# Altium PCB oled_control.PcbDoc
Units mm, origin at the board's own origin, x right, y up, seen from the top; angles counter-clockwise.
Board outline 80.24 x 28.14 mm, 2 copper layers (Top Layer, Bottom Layer); 56 components, 41 nets, 225 pads, 54 vias.
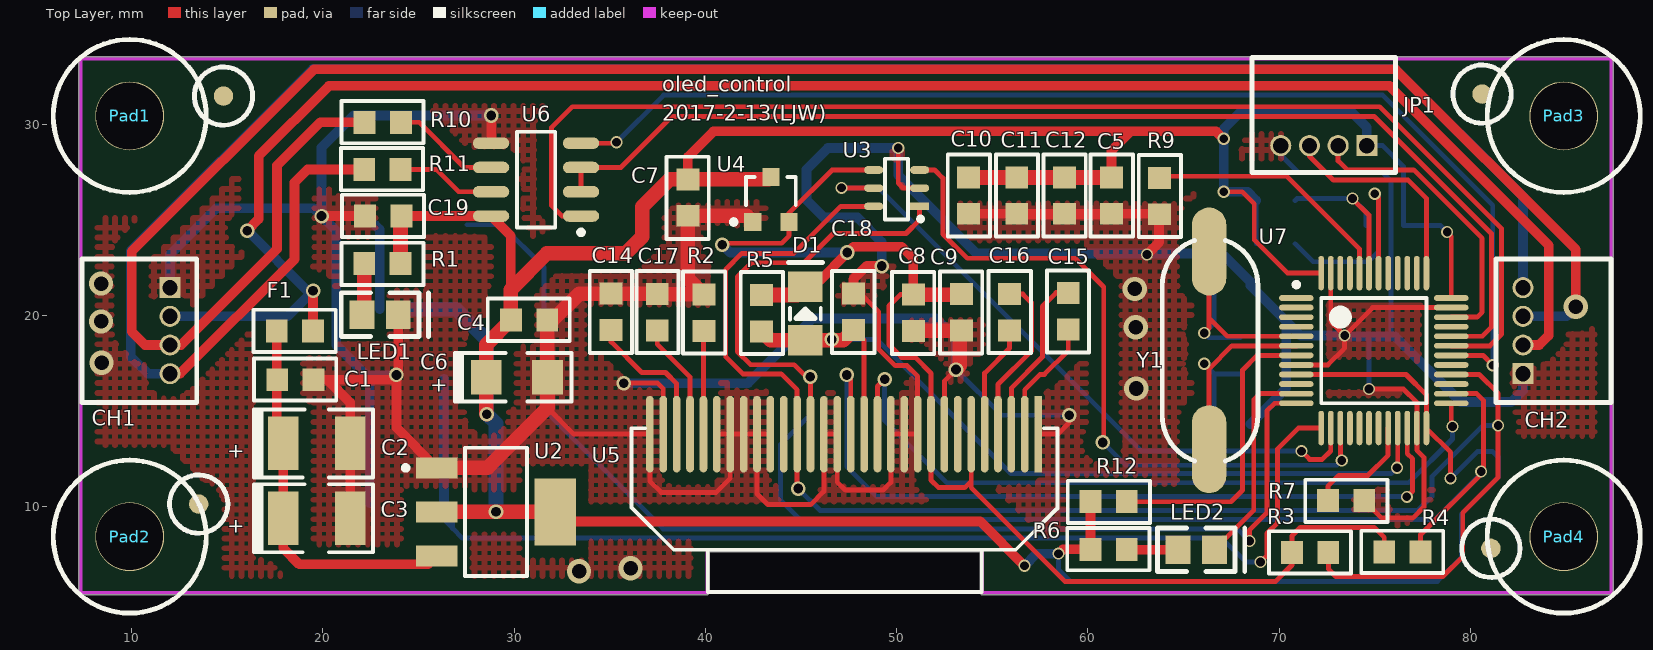
[diagram p0: Top Layer view]
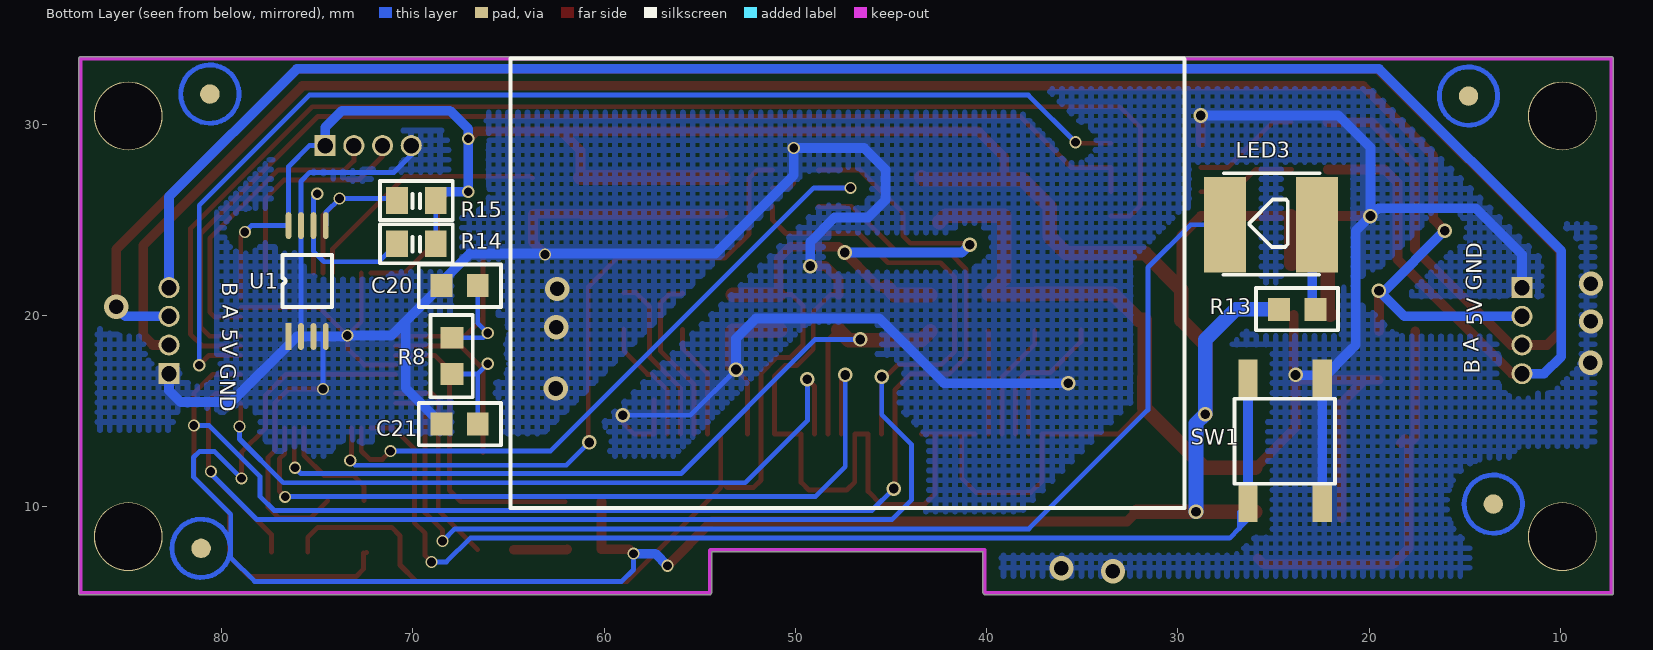
[diagram p1: Bottom Layer view, seen from below]

## Layer stack, top to bottom
Top Solder: solder mask 0.0102, Solder Resist, Dk 3.5
Top Layer: signal copper 0.0356
Dielectric 1: dielectric 0.32, FR-4, Dk 4.8
Bottom Layer: signal copper 0.0356
Bottom Solder: solder mask 0.0102, Solder Resist, Dk 3.5

## Board outline
7.341,5.386 40.056,5.386 ccw(c40.056,5.486) 40.127,5.415 40.178,5.466 ccw(c40.107,5.537) 40.207,5.537 40.207,7.647 54.383,7.647 54.383,5.512 ccw(c54.483,5.512) 54.412,5.441 54.437,5.415 ccw(c54.508,5.486) 54.508,5.386 87.376,5.386 ccw(c87.376,5.486) 87.476,5.486 87.476,33.426 ccw(c87.376,33.426) 87.376,33.527 7.341,33.527 ccw(c7.341,33.426) 7.24,33.426 7.24,5.486 ccw(c7.341,5.486)

## Design rules (kind name [scope] priority, off if disabled: settings)
Clearance Clearance_1 [InPolygon] p1: gap=0.635
Clearance [All] p2: gap=0.178
ComponentClearance [All] p1: gap=0 collisioncheckmode=3 verticalgap=0 showdistances=FALSE
PolygonConnect [All] p1: connectstyle=Direct reliefconductorwidth=0.254 reliefentries=4 polygonreliefangle="90 Angle" airgapwidth=0.254
RoutingVias [All] p1: holewidth=0.711 width=1.27 viastyle="Through Hole" minholewidth=0.711 minwidth=1.27 maxholewidth=0.711 maxwidth=1.27
SolderMaskExpansion [All] p1: expansion=0.102
Width [All] p1: maxlimit=2.54 minlimit=0.254 preferedwidth=2.54
28 further rules are at their usual default settings.

## Components (designator, comment, footprint, x,y, rotation, side; value= is the part's Value field where it differs from the comment)
C1 "Cap" 0805 18.567,16.637 r180 top
C2 "C_2200uF" "B: 3528" 19.685,13.31 r0 top
C3 "C_2200uF" "B: 3528" 19.685,9.398 r0 top
C4 "Cap" 0805 30.785,19.761 r180 top
C5 "Cap" 0805 61.239,26.264 r90 top
C6 "Cap Pol3" "CAP A-3216" 30.15,16.764 r0 top
C7 "Cap" 0805 39.091,26.162 r270 top
C8 "Cap" 0805 50.876,20.142 r270 top
C9 "Cap" 0805 53.391,20.168 r270 top
C10 "Cap" 0805 53.772,26.264 r90 top
C11 "Cap" 0805 56.286,26.264 r90 top
C12 "Cap" 0805 58.776,26.264 r90 top
C14 "Cap" 0805 35.077,20.193 r270 top
C15 "Cap" 0805 58.979,20.218 r270 top
C16 "Cap" 0805 55.905,20.168 r90 top
C17 "Cap" 0805 37.49,20.168 r90 top
C18 "Cap" 0805 47.752,20.193 r270 top
C19 "Cap" 0805 23.165,25.197 r180 top
C20 "Cap" 0805 67.564,21.565 r180 bottom
C21 "Cap" 0805 67.564,14.326 r180 bottom
CH1 "HEADER1X4" CON4_1.5 12.014,19.202 r270 top
CH2 "HEADER1X4" CON4_1.5 82.753,19.202 r90 top
D1 "Diode 1N4148" LL34 45.237,18.694 r90 top
F1 "FUSE" 0805 18.542,19.177 r180 top
JP1 "4 HEADER" CON4_1.5 72.339,28.88 r180 top
LED1 "" LED-0805 22.047,20.041 r0 top
LED2 "" LED-0805 64.719,7.747 r0 top
LED3 "" LED_5X5 22.733,24.74 r0 bottom
Pad1 "Pad" pad35 9.881,30.429 r0 top
Pad2 "Pad" pad35 9.881,8.433 r0 top
Pad3 "Pad" pad35 84.861,30.429 r0 top
Pad4 "Pad" pad35 84.861,8.433 r0 top
R1 "Res2" 0805 23.114,22.708 r0 top
R2 "Res2" 0805 39.929,20.142 r90 top
R3 "Res2" 0805 71.628,7.595 r180 top
R4 "Res2" 0805 76.454,7.62 r180 top
R5 "Res2" 0805 42.951,20.117 r90 top
R6 "Res2" 0805 61.087,7.772 r180 top
R7 "Res2" 0805 73.508,10.312 r0 top
R8 "Res2" 0805 67.97,17.882 r270 bottom
R9 "Res2" 0805 63.754,26.238 r90 top
R10 "Res2" 0805 23.139,30.099 r180 top
R11 "Res2" 0805 23.114,27.635 r180 top
R12 "Res2" 0805 61.087,10.262 r0 top
R13 "Res2" 0805 23.765,20.32 r0 bottom
R14 "Res2" C0805tan 69.825,23.749 r180 bottom
R15 "Res2" C0805tan 69.825,26.01 r180 bottom
SW1 "SW-KEY-2" KEY_SOP4X4 23.673,12.598 r270 bottom
U1 "AT24c02" TSSOP8 76.505,18.898 r90 bottom
U2 "AMS1117-3.3" SOT223 29.058,9.728 r270 top
U3 "GT20L16S1Y" SOT23-6 51.206,25.705 r180 top
U4 "662K" SOT-23 43.434,26.06 r0 top
U5 "OLED_0.96_12864" OLED_1.30_12864 57.404,13.792 r180 top
U6 "MAX3485CSA" NS08-L 33.503,25.197 r180 top
U7 "STM32F103C8T6" LQFP48 74.955,18.161 r0 top
Y1 "8MHz" XTAL_US1 66.396,20.599 r270 top

## Footprints (in the part's own frame and the unit in brackets; to place one, negate y for a bottom-side part, rotate by r counter-clockwise, add the part's x,y. Pads: shape width x height; smd on the part's side, far side on the other; paste and mask are expansions set on the pad)
0805 [mm] "1.14mm,1.2mm,3.05mm"
  rect 1.14x1.2 smd: 1(-0.95,0) 2(0.95,0)
  silkscreen extent -2.13,-1.12 2.16,1.09
"B: 3528" [mm] "钽电容B型"
  rect 1.6x2.8 smd: 1(-1.75,0) 2(1.75,0)
  silkscreen extent -3.27,-1.78 2.95,1.78
C0805tan [mil]
  rect 45x55 smd: 1(-40,0) 2(40,0)
  silkscreen extent -75,-40 75,40
"CAP A-3216" [mm]
  rect 1.6x1.8 smd: 1(-1.6,0) 2(1.6,0)
  silkscreen extent -3.25,-1.27 2.85,1.27
CON4_1.5 [mm]
  rect 1.1x1.1 hole 0.8: 1(-2.25,0)
  round 1.1 hole 0.8: 2(-0.75,0) 3(0.75,0) 4(2.25,0)
  silkscreen extent -3.75,-4.6 3.75,1.4
KEY_SOP4X4 [mm]
  rect 2x1 smd: 1(-4.089,1.219) 1(2.412,1.219) 2(-4.089,-2.671) 2(2.412,-2.671)
  silkscreen extent -3.05,-3.38 1.4,1.88
LED-0805 [mm]
  rect 1.3x1.5 smd: 1(0,0) 2(1.9,0)
  silkscreen extent -1.08,-1.14 3.49,1.14
LED_5X5 [mm]
  rect 2.2x5 smd: 1(0,0) 2(4.801,0)
  silkscreen extent -0.13,-2.69 4.9,2.62
LL34 [mm]
  rect 1.6x1.8 smd: 1(0,0) 2(2.8,0)
  silkscreen extent 1.1,-0.89 4.07,0.89
LQFP48 [mm]
  oval 1.8x0.3 smd: 1(-4.05,2.75) 2(-4.05,2.25) 3(-4.05,1.75) 4(-4.05,1.25) 5(-4.05,0.75) 6(-4.05,0.25) 7(-4.05,-0.25) 8(-4.05,-0.75) 9(-4.05,-1.25) 10(-4.05,-1.75) 11(-4.05,-2.25) 12(-4.05,-2.75) 25(4.05,-2.75) 26(4.05,-2.25) 27(4.05,-1.75) 28(4.05,-1.25) 29(4.05,-0.75) 30(4.05,-0.25) 31(4.05,0.25) 32(4.05,0.75) 33(4.05,1.25) 34(4.05,1.75) 35(4.05,2.25) 36(4.05,2.75)
  oval 0.3x1.8 smd: 13(-2.75,-4.05) 14(-2.25,-4.05) 15(-1.75,-4.05) 16(-1.25,-4.05) 17(-0.75,-4.05) 18(-0.25,-4.05) 19(0.25,-4.05) 20(0.75,-4.05) 21(1.25,-4.05) 22(1.75,-4.05) 23(2.25,-4.05) 24(2.75,-4.05) 37(2.75,4.05) 38(2.25,4.05) 39(1.75,4.05) 40(1.25,4.05) 41(0.75,4.05) 42(0.25,4.05) 43(-0.25,4.05) 44(-0.75,4.05) 45(-1.25,4.05) 46(-1.75,4.05) 47(-2.25,4.05) 48(-2.75,4.05)
  silkscreen extent -4.17,-2.75 2.75,3.57, body extent -3.5,-3.5 3.5,3.5, height 1.6
NS08-L [mm] "SOIC, 8-Leads, Body 4.9x3.9mm, Pitch 1.27mm, IPC High Density"
  oval 1.9x0.6 smd: 1(0,0) 2(0,-1.27) 3(0,-2.54) 4(0,-3.81) 5(4.7,-3.81) 6(4.7,-2.54) 7(4.7,-1.27) 8(4.7,0)
  silkscreen extent -0.13,-4.41 3.35,0.97, body extent 0.4,-4.36 4.3,0.55, height 1.75
OLED_1.30_12864 [mm]
  rect 0.4x4 smd: 1(0,0)
  oval 0.4x4 smd: 2(0.7,0) 3(1.4,0) 4(2.1,0) 5(2.8,0) 6(3.5,0) 7(4.2,0) 8(4.9,0) 9(5.6,0) 10(6.3,0) 11(7,0) 12(7.7,0) 13(8.4,0) 14(9.1,0) 15(9.8,0) 16(10.5,0) 17(11.2,0) 18(11.9,0) 19(12.6,0) 20(13.3,0) 21(14,0) 22(14.7,0) 23(15.4,0) 24(16.1,0) 25(16.8,0) 26(17.5,0) 27(18.2,0) 28(18.9,0) 29(19.6,0) 30(20.3,0)
  silkscreen extent -1.02,-0.3 21.26,8.26
pad35 [mm]
  round 3.6 hole 3.5: 1(0.025,0)
  silkscreen extent -3.97,-4 4.03,4
SOT23-6 [mm]
  rect 1x0.4 smd: 1(0,0)
  oval 1x0.4 smd: 2(0,-0.95) 3(0,-1.9) 4(2.4,-1.9) 5(2.4,-0.95) 6(2.4,0)
  silkscreen extent -0.15,-2.49 1.8,0.76
SOT223 [mm] "SOT-223/SC-73; 4 Leads; Body 6.7 x 7.3 mm, inc. leads (LxW max)"
  rect 1.1x2.15 smd: 1(-2.3,-3.1) 2(0,-3.1) 3(2.3,-3.1)
  rect 3.5x2.15 smd: 4(0,3.1)
  silkscreen extent -3.35,-4.85 3.35,1.63
SOT-23 [mm]
  rect 0.9x0.95 smd: 1(-0.95,-1.175) 2(0.95,-1.175) 3(0,1.175)
  silkscreen extent -2.07,-1.3 1.3,1.18
TSSOP8 [mm]
  rect 1.4x0.3 smd: 1(0,0)
  oval 1.4x0.3 smd: 2(0,-0.65) 3(0,-1.3) 4(0,-1.95) 5(5.8,-1.95) 6(5.8,-1.3) 7(5.8,-0.65) 8(5.8,0)
  silkscreen extent 1.53,-2.28 4.27,0.33
XTAL_US1 [mm]
  oval 4.6x1.8 smd: 1(-2.743,-0.051) 2(7.595,-0.051)
  silkscreen extent -3.33,-2.5 8.21,2.5

## Part data
C1 C4 C5 C7 C8 C9 C10 C11 C12 C14 C15 C16 C17 C18 C19 C20 C21: "Capacitor"
C6: "Polarized Capacitor (Surface Mount)"
D1: "High Conductance Fast Diode"
JP1: "4 Pin Header"
LED1 LED2 LED3: library part LED2, "Typical RED, GREEN, YELLOW, AMBER GaAs LED"
R1 R2 R3 R4 R5 R6 R7 R8 R9 R10 R11 R12 R13 R14 R15: "Resistor"
U1: library part TI24c02
U2: library part AMS1117-5
U6: library part MAX485CSA
Y1: library part XTAL, "Crystal Oscillator"

## Free pads (board coordinates)
  round 1.016 smd: 0(13.513,10.135) 0(14.808,31.471) 0(80.62,31.572) 0(81.077,7.823)
  round 1.016 smd far side: 0(13.513,10.135) 0(14.808,31.471) 0(80.62,31.572) 0(81.077,7.823)
  round 3.048 on Top Solder: 1(13.513,10.135) 1(14.808,31.471) 1(80.62,31.572) 1(81.077,7.823)
  round 3.048 on Bottom Solder: 1(13.513,10.135) 1(14.808,31.471) 1(80.62,31.572) 1(81.077,7.823)

## Via types
v1: diameter 0.635, hole 0.457, Top Layer to Bottom Layer, 26 vias
v2: diameter 0.762, hole 0.508, Top Layer to Bottom Layer, 19 vias
v3: diameter 1.27, hole 0.762, Top Layer to Bottom Layer, 9 vias

## Nets (pads, with @x,y where several pads share a name; then routed paths per layer and width w, separated by ;. In a path a pad name is that pad's centre, name@x,y a point inside that pad or via, vN(x,y) a via of type N, cw(c..) or ccw(c..) an arc to the next point about the centre after c; other vN are vias at no path point)
485_A: CH1.3 CH2.3 R10.2 | length 113.4
  Top Layer w0.508: R10.2 19.863,30.099 17.602,27.838 17.602,23.47 12.585,18.452 CH1.3 10.707,18.452 10.008,19.152 10.008,23.343 19.533,32.868 76.098,32.868 85.522,23.444 v3(85.522,20.447)
  Bottom Layer w0.508: CH2.3 85.027,19.952 v3(85.522,20.447)
485_B: CH1.4 CH2.4 R11.2 | length 109.1
  Top Layer w0.508: CH1.4 12.533,16.952 18.517,22.936 18.517,26.949 19.202,27.635 R11.2
  Bottom Layer w0.508: CH1.4 10.861,16.952 9.957,17.856 9.957,23.368 19.483,32.895 76.071,32.895 82.753,26.213 CH2.4
+3.3V: C4.2 C5.2 C6.1 C7.1 C10.2 C11.2 C12.2 C19.1 JP1.1 R1.2 R6.2 R12.1 R13.2 R14.2 R15.2 U1.8 U2.2 U2.4 U4.3 U6.8 U7.9 U7.24 U7.36 U7.48 | length 217.4
  Top Layer w0.254: v1(67.107,26.467) 68.072,26.467 68.707,25.832 68.707,23.952 70.448,22.211 U7.48 ; U7.9 76.637,16.911 77.705,15.843 U7.24 78.969,12.848 v1(78.969,11.481) ; v1@78.715,24.435 v1(78.791,24.359) 79.005,24.144 U7.36
  Top Layer w0.508: C19.1 U6.8 29.835,24.165 29.835,21.351 ; U2.4 32.666,9.22 54.381,9.22 v1(56.693,6.909) ; C7.1 39.091,28.296 40.424,29.629 62.243,29.629 ; v1(58.471,7.544) 58.699,7.772 R6.2 R12.1 ; C5.2 61.239,28.626 62.243,29.629 ; v1(67.107,29.235) 66.713,29.629 62.243,29.629
  Top Layer w0.762: R1.2 24.064,25.146 C19.1 ; U2.2 v2(29.058,9.728) U2.4 ; v2(28.575,14.834) 28.55,14.859 C6.1 28.55,18.476 C4.2 29.835,21.351 31.725,23.241 35.839,23.241 36.703,24.105 36.703,25.679 38.136,27.112 C7.1 43.311,27.112 U4.3 ; C10.2 C11.2 C12.2 C5.2
  Bottom Layer w0.254: v1(58.471,7.544) 58.471,6.706 59.08,6.096 78.283,6.096 79.527,7.341 79.527,9.601 81.483,11.557 81.483,12.573 81.178,12.878 80.366,12.878 v1(78.969,11.481) ; R14.2 R15.2 ; JP1.1 75.413,28.88 76.505,27.788 U1.8 78.452,24.698 v1(78.791,24.359) ; 82.601,7.823 ccw(c81.077,7.823) 82.601,7.823
  Bottom Layer w0.508: v1(56.693,6.909) 57.328,7.544 v1(58.471,7.544) ; R15.2 68.351,26.467 v1(67.107,26.467) v1(67.107,29.235) 67.107,29.743 68.072,30.709 73.711,30.709 74.589,29.83 JP1.1
  Bottom Layer w0.762: R13.2 26.975,20.32 28.575,18.72 v2(28.575,14.834) 29.058,14.351 v2(29.058,9.728)
+5V_IN: CH1.2 CH2.2 F1.1 | length 97.8
  Top Layer w0.508: v2(16.053,24.435) 16.65,25.032 16.65,28.334 20.32,32.004 75.771,32.004 84.099,23.676 84.099,18.948 83.603,18.452 CH2.2 ; F1.1 v2(19.492,21.285) 19.492,21.346 v2@19.507,21.361
  Bottom Layer w0.508: CH1.2 18.159,19.952 v2(19.492,21.285) 19.202,21.285 v2(16.053,24.435)
CLK: R4.1 U3.1 U5.18 U7.26 | length 79.2
  Top Layer w0.254: v2@45.39,16.688 44.653,17.424 42.367,17.424 41.681,18.11 41.681,22.022 42.418,22.758 45.161,22.758 46.685,24.282 50.495,24.282 51.206,24.994 U3.1 ; v2(45.491,16.789) 45.504,16.777 U5.18 ; R4.1 77.404,8.545 80.696,11.836 80.696,15.545 80.33,15.911 U7.26
  Bottom Layer w0.254: v2(45.491,16.789) 45.491,14.808 43.942,13.259 43.942,10.338 44.958,9.322 78.156,9.322 80.594,11.76 80.696,11.76 80.62,11.836 v1(80.569,11.836)
CS1: U5.13 U7.25 | length 39.1
  Top Layer w0.254: U5.13 49.004,16.289 v2(49.378,16.662) ; U7.25 79.005,14.263 v1(79.07,14.199)
  Bottom Layer w0.254: v2(49.378,16.662) 49.378,14.503 52.629,11.252 76.784,11.252 79.07,13.538 v1(79.07,14.199)
CS2: U3.3 U7.15 | length 36.8
  Top Layer w0.254: U3.3 51.999,27.605 52.426,27.178 52.426,24.257 53.696,22.987 59.334,22.987 60.833,21.488 60.833,13.411 v2(60.782,13.36) ; U7.15 73.205,12.494 v1(73.279,12.421)
  Bottom Layer w0.254: v2(60.782,13.36) 61.976,12.167 73.025,12.167 v1(73.279,12.421)
D/C: U5.15 U7.22 | length 42.7
  Top Layer w0.254: v2(47.396,16.891) 47.523,16.891 47.604,16.81 U5.15 ; U7.22 76.705,12.779 76.987,12.497 76.987,10.82 v1(76.683,10.516) 76.683,10.363 76.708,10.338 v1@76.784,10.414
  Bottom Layer w0.254: v2(47.396,16.891) 47.396,12.09 48.946,10.541 76.86,10.541 76.683,10.363 v1(76.683,10.516)
FSO: U3.5 U7.14 | length 34.5
  Top Layer w0.254: v1(47.117,26.67) 47.132,26.655 U3.5 ; v1(71.171,12.903) 71.603,12.471 72.263,12.471 72.705,12.914 U7.14
  Bottom Layer w0.254: v1(47.117,26.67) 49.047,26.67 62.814,12.903 v1(71.171,12.903)
GND: C1.1 C2.2 C3.2 C4.1 C5.1 C6.2 C7.2 C8.2 C9.2 C10.1 C11.1 C12.1 C14.1 C17.2 C18.1 C19.2 C20.1 C21.1 CH1.1 CH2.1 JP1.4 LED1.2 R2.2 R7.2 R9.1 SW1.1 U1.1 U1.2 U1.3 U1.4 U1.7 U2.1 U3.2 U4.1 U5.1 U5.8 U5.10 U5.11 U5.12 U5.16 U5.17 U5.21 U5.22 U5.23 U5.24 U5.25 U5.29 U5.30 U6.5 U7.8 U7.23 U7.35 U7.47 | length 314.7
  Top Layer w0.254: 31.75,15.164 33.121,13.792 U5.30 37.104,11.334 37.694,10.744 40.564,10.744 41.304,11.484 U5.24 ; v2(35.738,16.459) 37.516,16.459 37.804,16.171 U5.29 ; U5.25 U5.24 ; U5.21 U5.22 ; C18.1@47.752,21.092 48.174,21.092 49.073,20.193 49.073,18.237 49.936,17.374 50.546,17.374 51.104,16.816 U5.10 U5.11 U5.12 49.704,11.274 49.301,10.871 47.32,10.871 46.904,11.287 U5.16 U5.17 46.204,10.796 45.517,10.109 43.282,10.109 42.704,10.687 U5.22 ; v1(50.089,28.753) 50.089,26.924 50.358,26.655 U3.2 ; U5.8 52.504,16.563 v2(53.111,17.17) ; U5.1@57.404,15.57 U5.1 58.42,13.792 59.03,14.402 v2(59.03,14.783) ; U7.8 72.554,17.411 73.431,18.288 v1(73.431,18.948) ; U7.47 72.705,19.674 v1(73.431,18.948) ; R7.2 75.347,9.423 77.013,9.423 77.572,9.982 77.572,12.585 77.205,12.951 U7.23 77.205,15.454 76.505,16.154 v1(74.701,16.154) ; U7.35 74.894,20.411 v1(73.431,18.948) ; U5.24 U5.23 U5.22
  Top Layer w0.508: C1.1 20.244,16.637 ; v2(19.939,25.197) C19.2 ; C3.2 C2.2 21.435,15.446 20.244,16.637 ; LED1.2 23.947,16.988 v2(23.851,16.891) ; U2.1 23.851,14.135 v2(23.851,16.891) ; U6.5 v2(28.804,30.455) v2(28.804,30.455) ; C18.1@47.752,21.092 C18.1 47.752,21.895 48.438,22.581 v2(49.225,22.581) ; C10.1 C11.1 C12.1 C5.1 63.729,25.314 63.729,23.825 v1(63.094,23.19) ; C11.1@56.159,25.263 C5.1@61.163,25.263 ; 20.244,16.637 23.597,16.637 v2(23.851,16.891)
  Top Layer w0.762: U2.1 28.614,12.028 31.75,15.164 C6.2 31.735,16.779 C4.1 32.029,19.761 33.411,21.143 C14.1 37.465,21.143 C17.2 39.903,21.118 39.091,21.93 C7.2 42.157,25.212 U4.1 ; C8.2@50.8,19.218 C8.2@50.876,19.218 ; C8.2 53.289,19.192 53.315,19.167 53.315,17.374 v2(53.111,17.17)
  Bottom Layer w0.254: v2(53.111,17.17) 55.499,14.783 v2(59.03,14.783) ; JP1.4 70.089,28.387 70.993,27.483 75.387,27.483 75.855,27.015 U1.7 U1.2 ; U1.4 74.701,18.751 v1(74.701,16.154)
  Bottom Layer w0.508: CH1.1 12.014,23.19 14.427,25.603 19.533,25.603 v2(19.939,25.197) ; SW1.1@22.454,10.186 22.454,16.688 20.976,18.166 20.976,18.182 ; v2(23.851,16.891) 23.825,16.866 22.292,16.866 20.976,18.182 ; v2(28.804,30.455) 21.615,30.455 19.939,28.778 v2(19.939,25.197) ; v2(35.738,16.459) 42.24,16.459 45.618,19.837 52.07,19.837 53.111,18.796 v2(53.111,17.17) ; v2(49.225,22.581) 49.225,23.851 47.955,25.121 46.203,25.121 45.288,26.035 45.288,27.635 46.406,28.753 v1(50.089,28.753) 50.089,27.33 54.178,23.241 67.031,23.241 68.514,21.758 C20.1 70.383,19.695 ; C21.1 70.383,16.195 70.383,19.695 ; CH2.1 82.753,16.078 82.144,15.469 79.502,15.469 76.073,18.898 U1.2 U1.3 U1.4 73.482,18.898 v1(73.431,18.948) 71.13,18.948 70.383,19.695 ; v2(19.939,25.197) 20.701,24.435 20.701,18.456 20.976,18.182
  other v3: 33.401,6.629 36.093,6.782 62.535,16.18 8.433,17.526 62.509,19.38 8.407,19.685 62.459,21.387 8.407,21.666
LED1: LED2.2 U7.11 | length 11.1
  Top Layer w0.254: LED2.2 68.682,9.809 68.682,15.596 68.997,15.911 U7.11
LED2: LED3.2 U7.12 | length 61
  Top Layer w0.254: v1(68.453,8.204) 68.453,8.763 69.367,9.677 69.367,15.011 69.767,15.411 U7.12
  Bottom Layer w0.254: LED3.2 29.337,24.74 31.572,22.504 31.572,15.062 37.795,8.839 67.818,8.839 v1(68.453,8.204)
MOSI: R3.1 U3.6 U5.19 U7.28 | length 83.5
  Top Layer w0.254: v2(44.856,10.947) 44.804,11 U5.19 44.804,16.105 43.967,16.942 41.961,16.942 41.072,17.831 41.072,22.403 41.91,23.241 44.628,23.241 47.092,25.705 U3.6 ; R3.1@72.426,7.595 R3.1@72.426,7.62 ; R3.1 72.578,6.746 72.974,6.35 78.562,6.35 79.604,7.391 79.604,9.677 81.458,11.532 v1(81.458,14.249) 81.458,15.926 80.473,16.911 U7.28
  Bottom Layer w0.254: v2(44.856,10.947) 45.999,9.804 77.267,9.804 78.003,10.541 78.003,11.582 80.67,14.249 v1(81.458,14.249)
NetC1_2: C1.2 C2.1 C3.1 F1.2 U2.3 | length 20.1
  Top Layer w0.508: F1.2 17.592,13.653 C2.1 C3.1 17.935,7.821 18.771,6.985 25.514,6.985 U2.3@25.817,7.287 ; C2.1@18.136,13.541 C2.1@18.341,13.335
NetC14_2: C14.2 U5.28 | length 7.6
  Top Layer w0.254: C14.2 35.077,18.618 36.678,17.018 37.922,17.018 38.504,16.436 U5.28
NetC15_1: C15.1 U5.3 | length 9
  Top Layer w0.254: U5.3 56.004,16.202 57.633,17.831 57.633,20.483 58.344,21.194 58.953,21.194 C15.1
NetC15_2: C15.2 U5.2 | length 6.6
  Top Layer w0.254: U5.2 56.704,16.115 57.506,16.916 57.734,16.916 58.979,18.161 C15.2 C15.2@58.979,19.294
NetC16_1: C16.1 U5.5 | length 6
  Top Layer w0.254: U5.5 54.604,16.987 55.905,18.288 C16.1 C16.1@55.905,19.268
NetC16_2: C16.2 U5.4 | length 9
  Top Layer w0.254: U5.4 55.304,16.391 57.048,18.136 57.048,20.676 56.606,21.118 55.956,21.118 C16.2@55.905,21.168
NetC17_1: C17.1 U5.27 | length 6.1
  Top Layer w0.254: C17.1 37.49,18.491 39.204,16.778 U5.27
NetC20_2: C20.2 R8.1 U7.5 Y1.1 | length 13.8
  Top Layer w0.254: v1(66.091,19.075) 66.345,19.329 66.345,19.863 ; Y1.1@66.345,23.165 66.345,19.863 ; U7.5 67.297,18.911 66.345,19.863
  Bottom Layer w0.254: C20.2 66.614,19.599 v1(66.091,19.075) 66.335,18.832 R8.1
NetC21_2: C21.2 R8.2 U7.6 Y1.2 | length 14.6
  Top Layer w0.254: v1@66.065,17.475 v1(66.091,17.475) 66.345,17.221 ; Y1.2@66.345,12.827 Y1.2 66.345,17.221 ; U7.6 67.535,18.411 66.345,17.221
  Bottom Layer w0.254: v1(66.091,17.475) 66.614,16.952 ; C21.2 66.614,16.952 ; R8.2 66.634,16.932 66.614,16.952
NetLED1_1: LED1.1 R1.1 | length 2.7
  Top Layer w0.762: LED1.1 22.164,20.157 R1.1
NetLED2_1: LED2.1 R6.1 | length 2.7
  Top Layer w0.508: R6.1@61.935,7.772 R6.1@61.961,7.747 ; R6.1@62.062,7.747 LED2.1
NetLED3_1: LED3.1 R13.1 | length 4.5
  Bottom Layer w0.508: LED3.1 22.977,24.496 R13.1@22.977,20.32
NetR2_1: R2.1 U5.26 | length 5.4
  Top Layer w0.254: U5.26 39.904,19.167 R2.1
NetR7_1: R7.1 U7.20 | length 6
  Top Layer w0.254: R7.1 72.558,11.064 73.127,11.633 74.651,11.633 75.705,12.688 U7.20
NetR9_2: R9.2 U7.44 | length 13.3
  Top Layer w0.254: R9.2 63.845,27.28 70.409,27.28 74.205,23.483 U7.44
NetR10_1: R10.1 U6.6 | length 5.7
  Top Layer w0.254: R10.1 25.044,30.099 27.407,27.737 U6.6
NetR11_1: R11.1 U6.7 | length 5.2
  Top Layer w0.254: R11.1 25.933,27.635 27.102,26.467 U6.7
NetR12_2: R12.2 U7.7 | length 15.7
  Top Layer w0.254: R12.2 67.488,10.262 68.097,10.871 68.097,17.145 68.863,17.911 U7.7
NetSW1_2: SW1.2 U7.13 | length 60.9
  Top Layer w0.254: v1(69.037,7.112) 69.367,7.442 69.367,8.611 69.926,9.169 69.926,13.03 71.007,14.111 U7.13
  Bottom Layer w0.254: SW1.2@26.344,10.186 26.344,9.313 26.792,8.866 ; SW1.2@26.792,9.739 26.792,8.866 ; v1(69.037,7.112) 68.25,7.112 67.005,8.357 27.301,8.357 26.792,8.866
  Bottom Layer w0.508: SW1.2@26.344,10.186 SW1.2@26.344,16.688
PA9_USART1_TX: U6.4 U7.30 | length 61.8
  Top Layer w0.254: U6.4 35.306,29.007 v1(35.357,29.058) ; U7.30 80.666,17.911 v1(81.178,17.399)
  Bottom Layer w0.254: v1(35.357,29.058) 37.821,31.521 75.413,31.521 81.178,25.756 v1(81.178,17.399)
PA10_USART1_RX: U6.1 U7.31 | length 67
  Top Layer w0.254: U6.1 32.512,25.197 31.953,25.756 31.953,29.82 33.045,30.912 75.26,30.912 81.636,24.536 81.636,19.025 81.022,18.411 U7.31
PA11_RE485: U6.2 U6.3 U7.32 | length 59.7
  Top Layer w0.254: U6.2 U6.3 35.585,27.737 38.252,30.404 74.981,30.404 81.102,24.282 81.102,19.38 80.633,18.911 U7.32
PB6_SCL: R14.1 U1.6 U7.42 | length 12.3
  Top Layer w0.254: v1(75.006,26.365) 75.205,26.166 U7.42
  Bottom Layer w0.254: R14.1 71.78,22.809 74.651,22.809 75.205,23.363 U1.6 75.205,26.167 v1(75.006,26.365)
PB7_SDA: R15.1 U1.5 U7.43 | length 9
  Top Layer w0.254: v1(73.838,26.111) 74.705,25.244 U7.43
  Bottom Layer w0.254: R15.1 70.942,26.111 v1(73.838,26.111) 74.555,25.394 U1.5
RES: C18.2 D1.1 R5.1 U5.14 U7.21 | length 45.7
  Top Layer w0.254: C18.2 48.304,18.691 U5.14 ; v1(76.175,12.04) 76.205,12.07 U7.21
  Top Layer w0.762: R5.1 43.424,18.694 D1.1 47.203,18.694 C18.2
  Bottom Layer w0.254: v2@46.685,18.821 v2(46.609,18.745) 48.971,18.745 55.982,11.735 75.87,11.735 v1(76.175,12.04)
TCK/SWCLK: JP1.3 U7.37 | length 11.5
  Top Layer w0.254: JP1.3 71.589,28.334 72.847,27.076 76.759,27.076 77.705,26.13 U7.37
TMS/SWDIO: JP1.2 U7.34 | length 15.6
  Top Layer w0.254: JP1.2 73.089,28.079 73.558,27.61 77.038,27.61 80.62,24.028 80.62,20.168 80.363,19.911 U7.34
VCC_OLED: C8.1 C9.1 D1.2 R3.2 R4.2 R5.2 U3.4 U4.2 U5.6 U5.9 | length 74.3
  Top Layer w0.254: v2(40.894,23.698) 40.97,23.774 43.993,23.774 44.384,24.166 U4.2 44.384,25.359 46.629,27.605 U3.4 ; C8.1 50.201,21.092 49.606,20.498 49.606,18.466 50.267,17.805 50.978,17.805 51.804,16.979 U5.9 51.804,11.391 52.197,10.998 53.569,10.998 53.904,11.334 ; U5.6 53.904,11.334 ; R4.2 75.504,8.392 74.981,8.915 71.12,8.915 70.678,8.473 R3.2 70.678,6.949 69.825,6.096 58.801,6.096 53.904,10.993 53.904,11.334
  Top Layer w0.508: D1.2 45.65,21.494 47.752,23.597 50.267,23.597 50.876,22.987 C8.1
  Top Layer w0.762: R5.2 44.81,21.067 D1.2 ; C8.1 C9.1@53.289,21.092
  Bottom Layer w0.508: v2(40.894,23.698) 41.3,23.292 v2(47.422,23.292)
pads on no net: Pad1.1 Pad2.1 Pad3.1 Pad4.1 U5.7 U5.20 U7.1 U7.2 U7.3 U7.4 U7.10 U7.16 U7.17 U7.18 U7.19 U7.27 U7.29 U7.33 U7.38 U7.39 U7.40 U7.41 U7.45 U7.46
copper on no net: | length 28.7
  Bottom Layer w0.254: 15.037,10.135 ccw(c13.513,10.135) 15.037,10.135 ; 16.332,31.471 ccw(c14.808,31.471) 16.332,31.471 ; 82.144,31.572 ccw(c80.62,31.572) 82.144,31.572

## Polygon pours and split planes (outlines as drawn)
GND on Top Layer "Top Layer-No Net" (hatched 90Degree grid 0.508 track 0.305, remove dead copper, pour order 2): 11.938,33.426 11.989,33.477 79.4,33.477 79.4,29.185 80.924,27.661 83.388,25.197 86.589,25.197 87.274,25.197 87.376,25.095 87.274,24.994 87.274,13.691 82.499,13.691 81.28,12.471 79.985,11.176 79.985,6.121 79.985,6.071 79.35,5.436 79.248,5.334 54.788,5.334 54.507,5.334 54.406,5.435 54.458,5.486 54.458,7.747 40.31,7.747 39.98,7.417 39.954,7.391 39.954,5.486 14.91,5.486 14.859,5.537 14.859,8.941 14.859,10.338 12.192,13.005 11.989,13.208 7.468,13.208 7.468,24.74 7.518,24.79 7.417,24.892 7.417,25.095 11.836,25.095 12.294,25.552 14.554,27.813 14.554,30.404 14.554,33.147 15.062,33.655
GND on Bottom Layer "Top Layer-No Net" (hatched 90Degree grid 0.508 track 0.305, remove dead copper, pour order 3): 14.554,33.325 14.605,33.274 79.35,33.274 79.35,29.21 79.654,28.905 83.668,24.892 83.947,24.892 87.63,24.892 87.224,24.486 87.224,13.995 82.448,13.995 81.966,13.513 79.35,10.897 79.35,10.719 79.35,6.096 79.807,5.639 79.641,5.473 54.39,5.473 54.39,7.639 54.383,7.647 54.282,7.747 40.107,7.747 40.107,5.639 39.954,5.486 14.757,5.486 14.757,10.135 14.961,10.338 12.141,13.157 12.04,13.157 7.976,13.157 7.62,13.513 7.671,13.564 7.671,24.79 12.192,24.79 12.294,24.892 14.707,27.305 14.707,27.534 14.707,33.02 15.011,33.325

## Keep-outs
Keep-Out Layer:
  lines w0.2: 40.107,5.817 40.107,5.537 ; 40.107,5.537 40.107,7.747 54.458,7.747 54.483,7.722 54.483,5.512 54.508,5.486 87.376,5.486 87.376,33.426 28.956,33.426 7.341,33.426 7.341,5.486 39.954,5.486 40.056,5.486 40.107,5.537

## Silkscreen, mask and mechanical layers (free items; w line width, h text height)
Top Overlay:
  circle w0.254: c14.808,31.471 r1.524
  circle w0.254: c13.513,10.135 r1.524
  circle w0.254: c81.077,7.823 r1.524
  circle w0.254: c80.62,31.572 r1.524
  text "oled_control" at 37.744,31.699 h0.8
  text "2017-2-13(LJW)" at 37.744,30.175 h0.8
Bottom Overlay:
  text "B" at 79.985,21.742 h0.8 r90
  text "GND" at 14.122,21.285 h0.8 r270
  text "A" at 79.959,20.549 h0.8 r90
  text "5V" at 14.097,19.456 h0.8 r270
  text "5V" at 79.985,19.304 h0.8 r90
  text "A" at 14.275,18.11 h0.8 r270
  text "GND" at 80.076,17.475 h0.8 r90
  text "B" at 14.224,16.942 h0.8 r270

## Text inside footprints (layer, text, board x,y; h text height)
C2: Top Overlay "+" at 15.014,12.548 h0.8
C3: Top Overlay "+" at 15.014,8.636 h0.8
C6: Top Overlay "+" at 25.629,16.002 h0.8